# EAGLE board untitled (EAGLE 6.2)
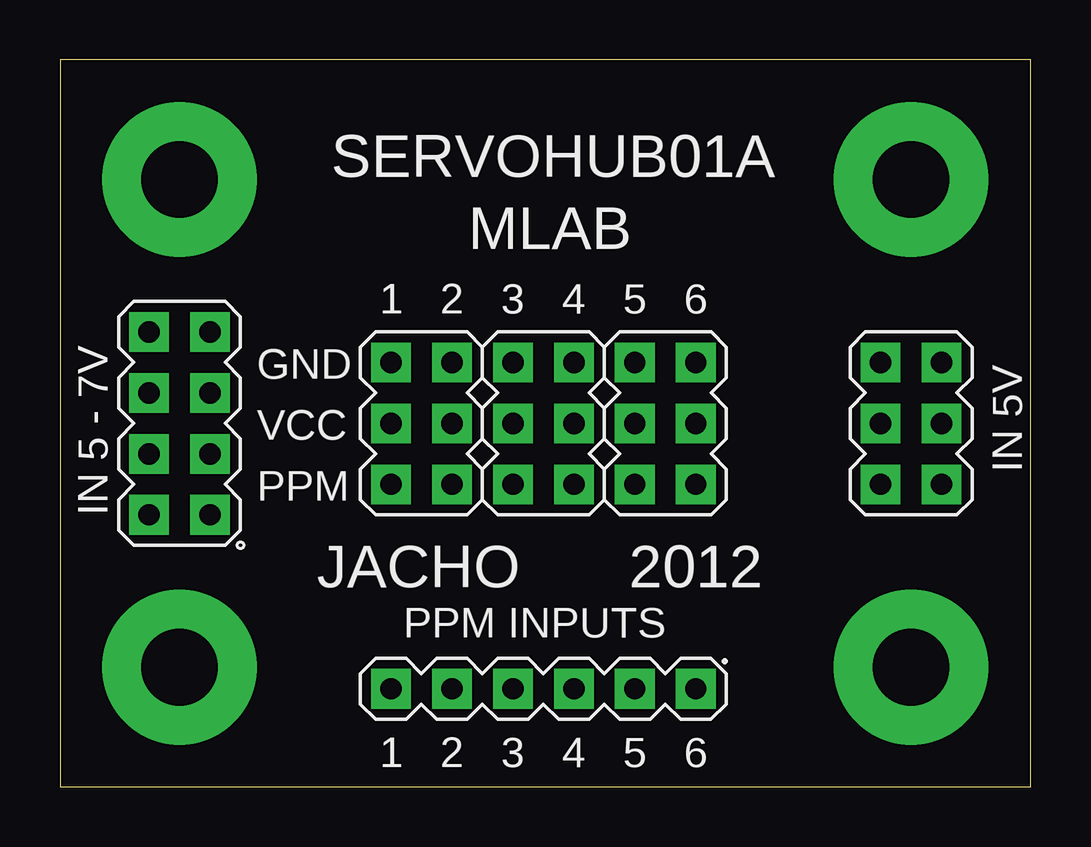
[diagram p0: board, top side]
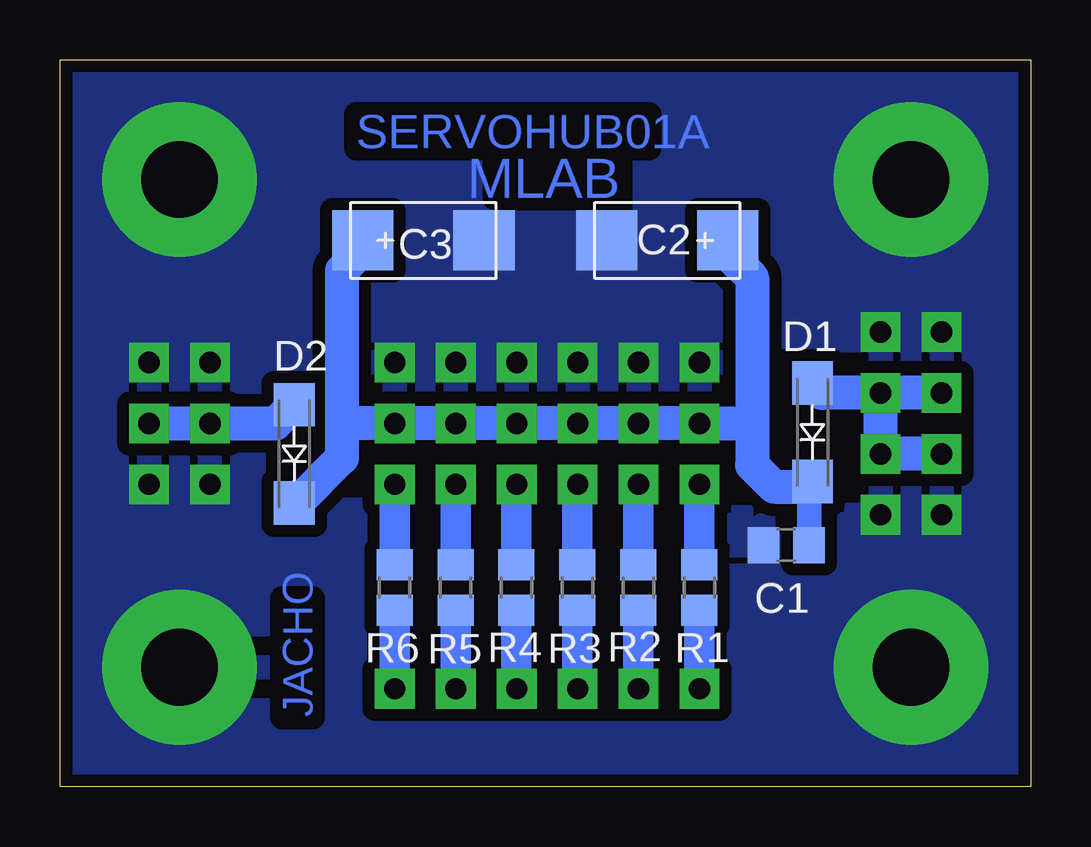
[diagram p1: board, bottom side, seen from below]

Size 40.44 x 30.28 mm. Coordinates in mm from the lower left corner, seen from the top.
Outline: 0,0 40.44,0 40.44,30.28 0,30.28 0,0
Copper layers (1*16): Top 0.035mm / dielectric 1mm / Bottom 0.035mm
Design rules: minimum track width 12mil, minimum drill 24mil, track to track 20mil, track to pad 20mil, pad to pad 20mil, via to via 20mil, smd to smd 8mil, copper to edge 20mil, drill to drill 70mil, minimum pad ring 10mil, minimum via ring 8mil, stop-mask expansion 5mil, vias tented up to drill 0mil, thermal gap 0mil

## Footprints (pad centres in the part's own frame; a part is rotated, then mirrored left to right if it is on the bottom)
C0805 = smd 1.3 x 1.5: 1 -0.95,0; 2 0.95,0
C = smd 2.55 x 2.5: + 2.525,0; - -2.525,0
SMA = smd 1.8 x 1.7: A -2.05,0; K 2.05,0
0805 = smd 1.3 x 1.5: 1 -0.95,0; 2 0.95,0
MA04-2 = drill 0.889 pad 1.651 square: 1 -3.81,-1.27; 2 -3.81,1.27; 3 -1.27,-1.27; 4 -1.27,1.27; 5 1.27,-1.27; 6 1.27,1.27; 7 3.81,-1.27; 8 3.81,1.27
MA03-2 = drill 0.889 pad 1.651 square: 1 -2.54,-1.27; 2 -2.54,1.27; 3 0,-1.27; 4 0,1.27; 5 2.54,-1.27; 6 2.54,1.27
MA06-1 = drill 0.889 pad 1.651 square: 1 -6.35,0; 2 -3.81,0; 3 -1.27,0; 4 1.27,0; 5 3.81,0; 6 6.35,0
SROUB3M = drill 3.2 pad 6.452: P$1 0,0

## Placement (x,y rotation side)
C1  470n  [C0805]  10.18,10.07 180 bottom
C2  100uF  [C]  15.14,22.76 0 bottom
C3  470nF  [C]  25.3,22.76 180 bottom
D1  M4  [SMA]  9.09,14.77 270 bottom
D2  M4  [SMA]  30.68,13.87 270 bottom
R1  [0805]  13.8,8.3 90 bottom
R2  [0805]  16.34,8.3 90 bottom
R3  [0805]  18.88,8.3 90 bottom
R4  [0805]  21.42,8.3 90 bottom
R5  [0805]  23.96,8.3 90 bottom
R6  [0805]  26.5,8.3 90 bottom
SV1  [MA04-2]  4.98,15.14 90 top
SV2  [MA03-2]  35.46,15.14 90 top
SV3  [MA06-1]  20.14,4.08 180 top
SW1  [MA03-2]  15.06,15.14 270 top
SW2  [MA03-2]  20.14,15.14 270 top
SW3  [MA03-2]  25.22,15.14 270 top
X1  [SROUB3M]  4.98,25.3 0 top
X2  [SROUB3M]  35.46,25.3 0 top
X3  [SROUB3M]  35.46,4.98 0 top
X4  [SROUB3M]  4.98,4.98 0 top

## Library data of the parts
C1 = rcl
C2 C3 = PaJa_C-tantal_SMD
D1 D2 X1-X4 = moje
R1-R6 = moje_R
SV1-SV3 = moje_hrebinky; OC_FARNELL: unknown; OC_NEWARK: unknown
SW1-SW3 = moje_hrebinky

## Nets
GND: C1.2 C2.- C3.- SV1.1 SV1.2 SV1.7 SV1.8 SV2.1 SV2.2 SV2.5 SV2.6 SW1.1 SW1.2 SW2.1 SW2.2 SW3.1 SW3.2 X1.P$1 X2.P$1 X3.P$1 X4.P$1
N$1: R1.1 SV3.6
N$2: D1.A SV1.3 SV1.4 SV1.5 SV1.6
N$3: R2.1 SV3.5
N$4: R3.1 SV3.4
N$5: C1.1 C2.+ C3.+ D1.K D2.K SW1.3 SW1.4 SW2.3 SW2.4 SW3.3 SW3.4
N$6: R4.1 SV3.3
N$7: D2.A SV2.3 SV2.4
N$8: R5.1 SV3.2
N$9: R6.1 SV3.1
N$10: R1.2 SW1.5
N$11: R2.2 SW1.6
N$12: R3.2 SW2.5
N$13: R4.2 SW2.6
N$14: R5.2 SW3.5
N$15: R6.2 SW3.6

## Tracks (layer width: path | path; a pad name or v marks a point on that pad's centre or on a via)
GND
  pour Bottom: -0.1,30.2 40.4,30.2 40.4,-0.1 -0.1,-0.1
N$1
  Bottom 1.27: SV3.6 R1.1
N$2
  Bottom 1.422: SV1.6 SV1.5 | SV1.5 8.68,16.41 D1.A | SV1.4 SV1.3 SV1.5
N$3
  Bottom 1.27: SV3.5 R2.1
N$4
  Bottom 1.27: SV3.4 R3.1
N$5
  Bottom 1.016: C1.1 9.23,12.58 D1.K
  Bottom 1.422: C3.+ 27.82,22.38 28.7,21.5 28.7,14.9 | 28.7,14.9 28.7,13.7 30.58,11.82 D2.K | 28.7,14.9 28.46,15.14 SW3.4 SW3.3 SW2.4 SW2.3 SW1.4 SW1.3 11.96,15.14 11.6,15.5 | C2.+ 12.62,22.21 11.6,21.2 11.6,15.5 | 11.6,15.5 11.6,13.4 10.7,12.5 9.2,12.5 9.2,12.61 D1.K
N$6
  Bottom 1.27: SV3.3 R4.1
N$7
  Bottom 1.422: SV2.3 SV2.4 31.46,15.14 D2.A
N$8
  Bottom 1.27: SV3.2 R5.1
N$9
  Bottom 1.27: SV3.1 R6.1
N$10
  Bottom 1.27: SW1.5 R1.2
N$11
  Bottom 1.27: SW1.6 R2.2
N$12
  Bottom 1.27: SW2.5 R3.2
N$13
  Bottom 1.27: SW2.6 R4.2
N$14
  Bottom 1.27: SW3.5 R5.2
N$15
  Bottom 1.27: SW3.6 R6.2

## Text on the board
Bottom: SERVOHUB01A | MLAB | JACHO
tPlace: SERVOHUB01A | MLAB | 1 | 2 | 3 | 4 | 5 | 6 | GND | VCC | IN 5V | PPM | IN 5 - 7V | JACHO | 2012 | PPM INPUTS | 1 | 2 | 3 | 4 | 5 | 6